# Altium PCB LCLFilter_CustomComp_Compact.PcbDoc
Units mm, origin at the board's own origin, x right, y up, seen from the top; angles counter-clockwise.
Board outline 127 x 101 mm, 2 copper layers (Top Layer, Bottom Layer); 17 components, 15 nets, 37 pads, 0 vias.
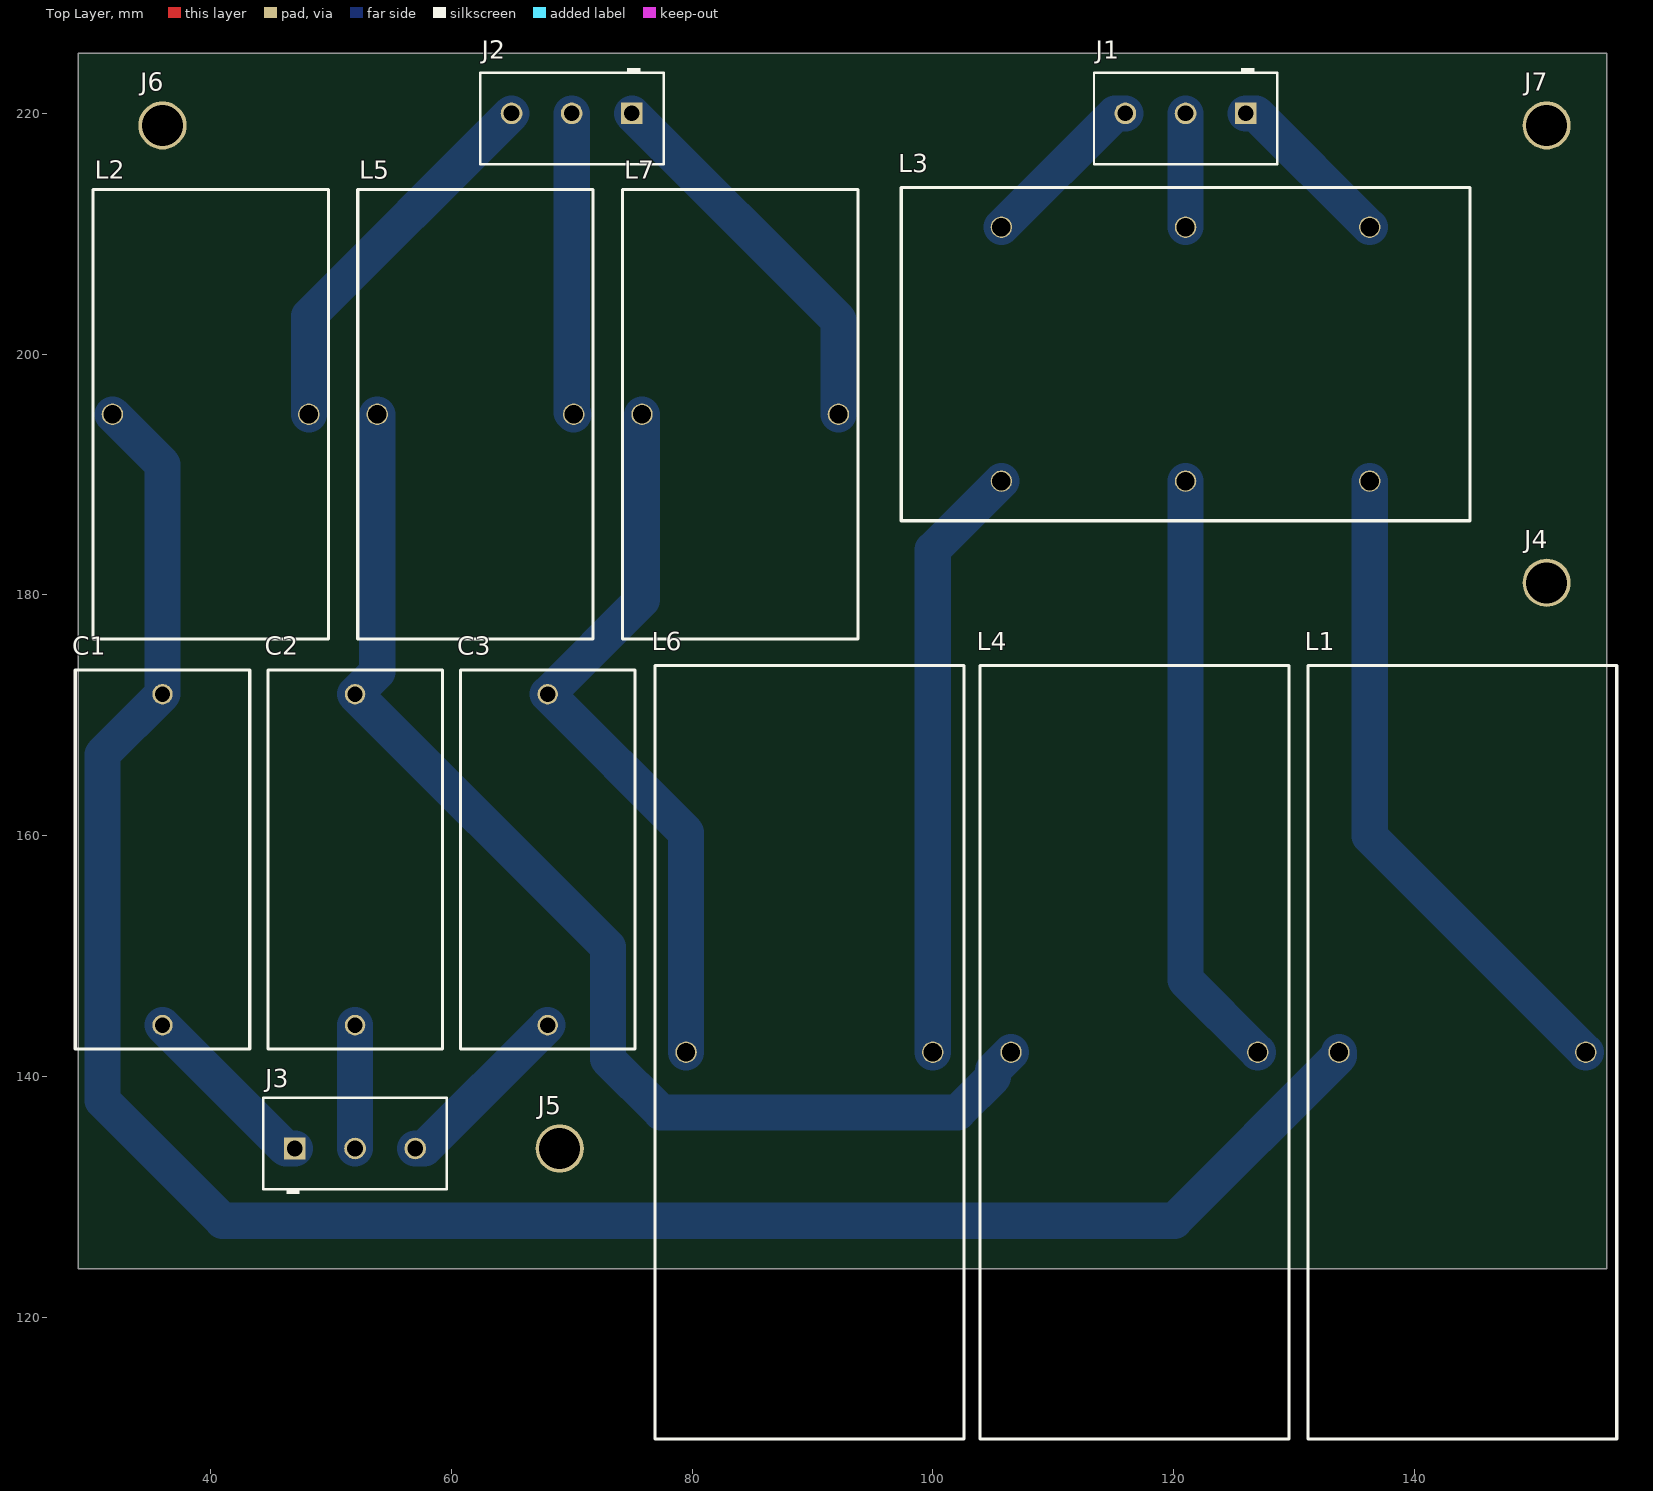
[diagram p0: Top Layer view]
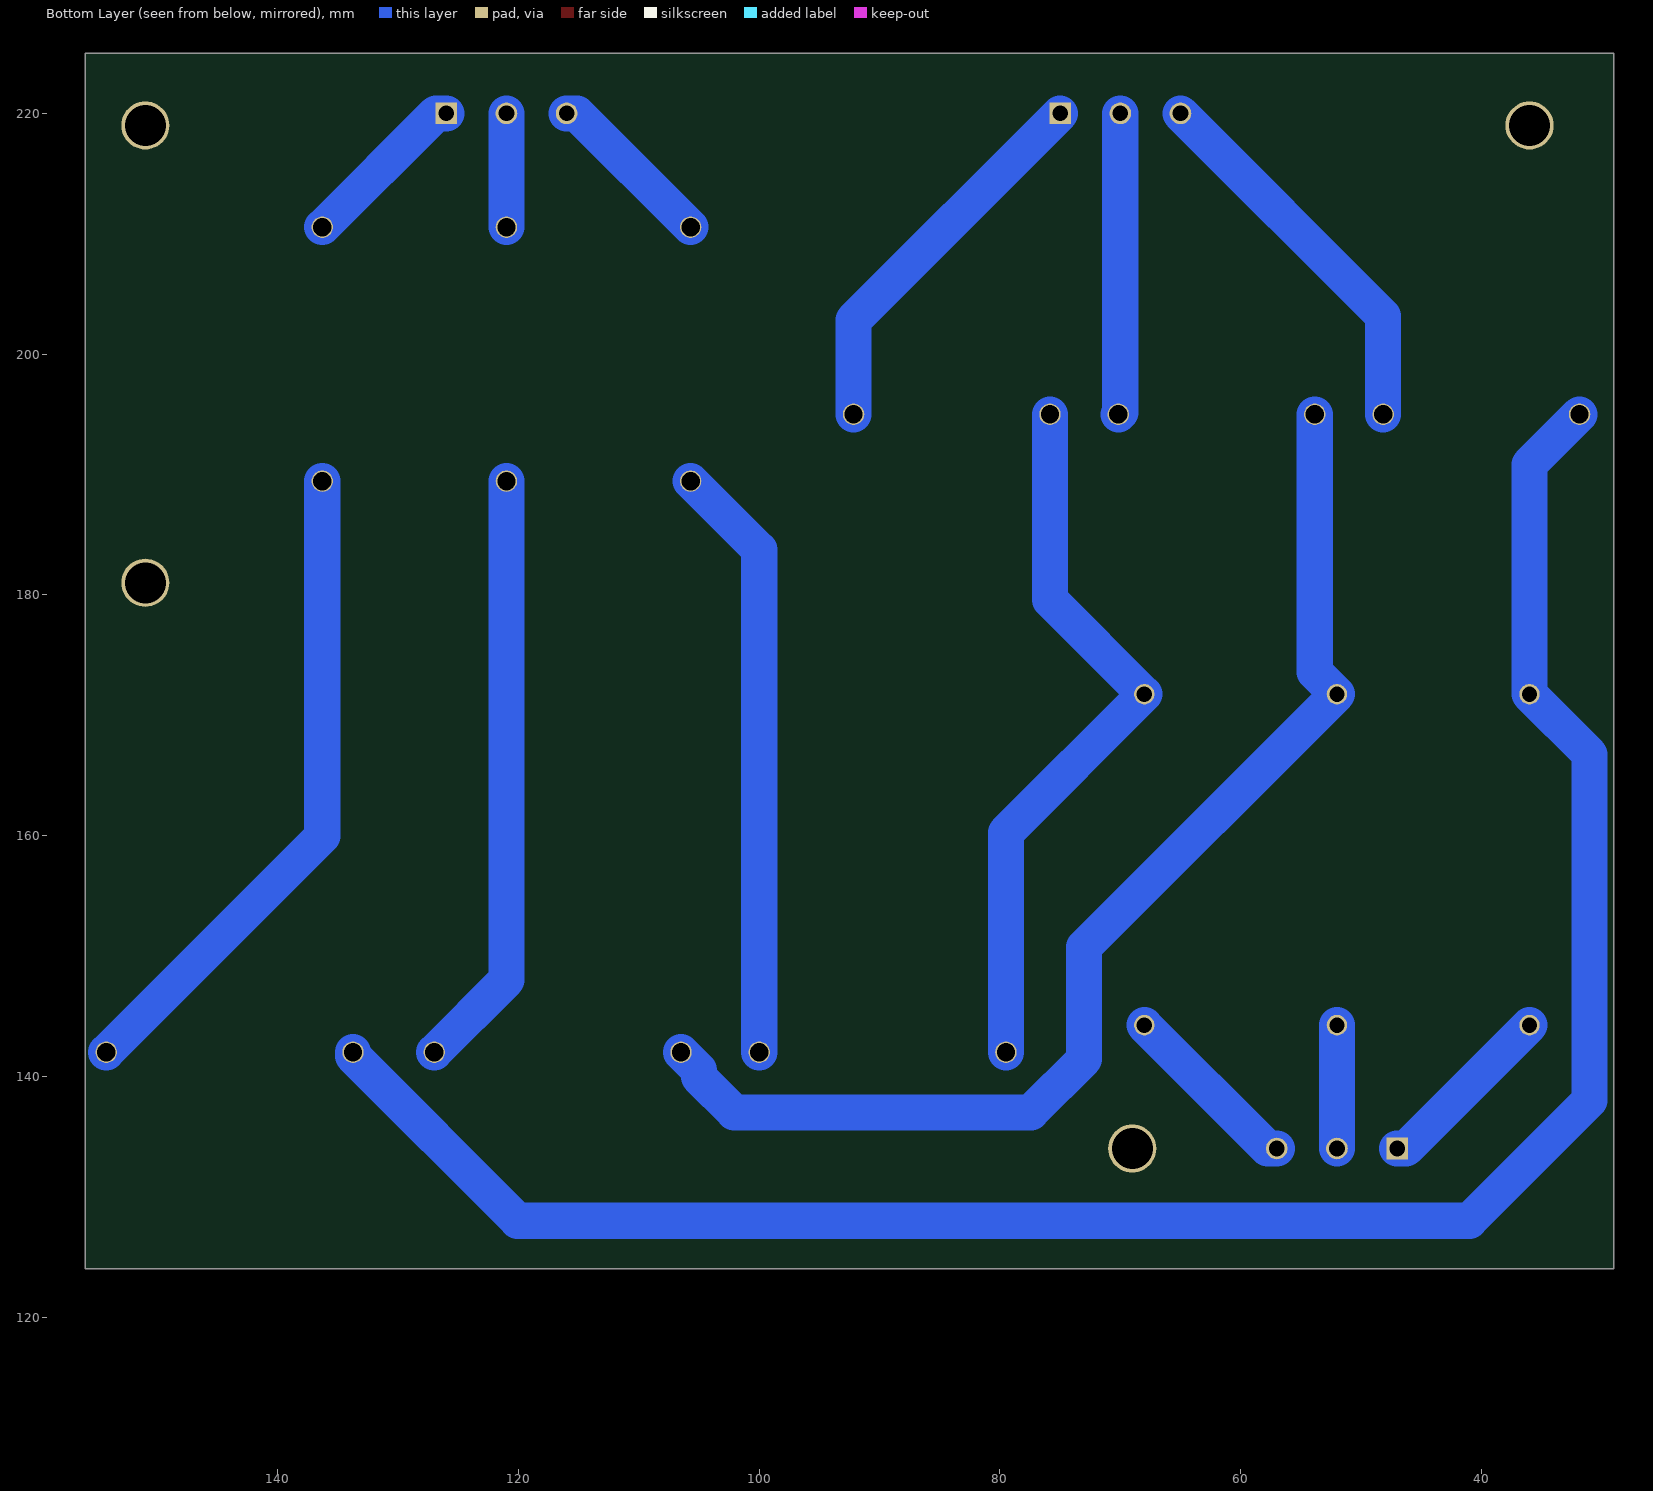
[diagram p1: Bottom Layer view, seen from below]
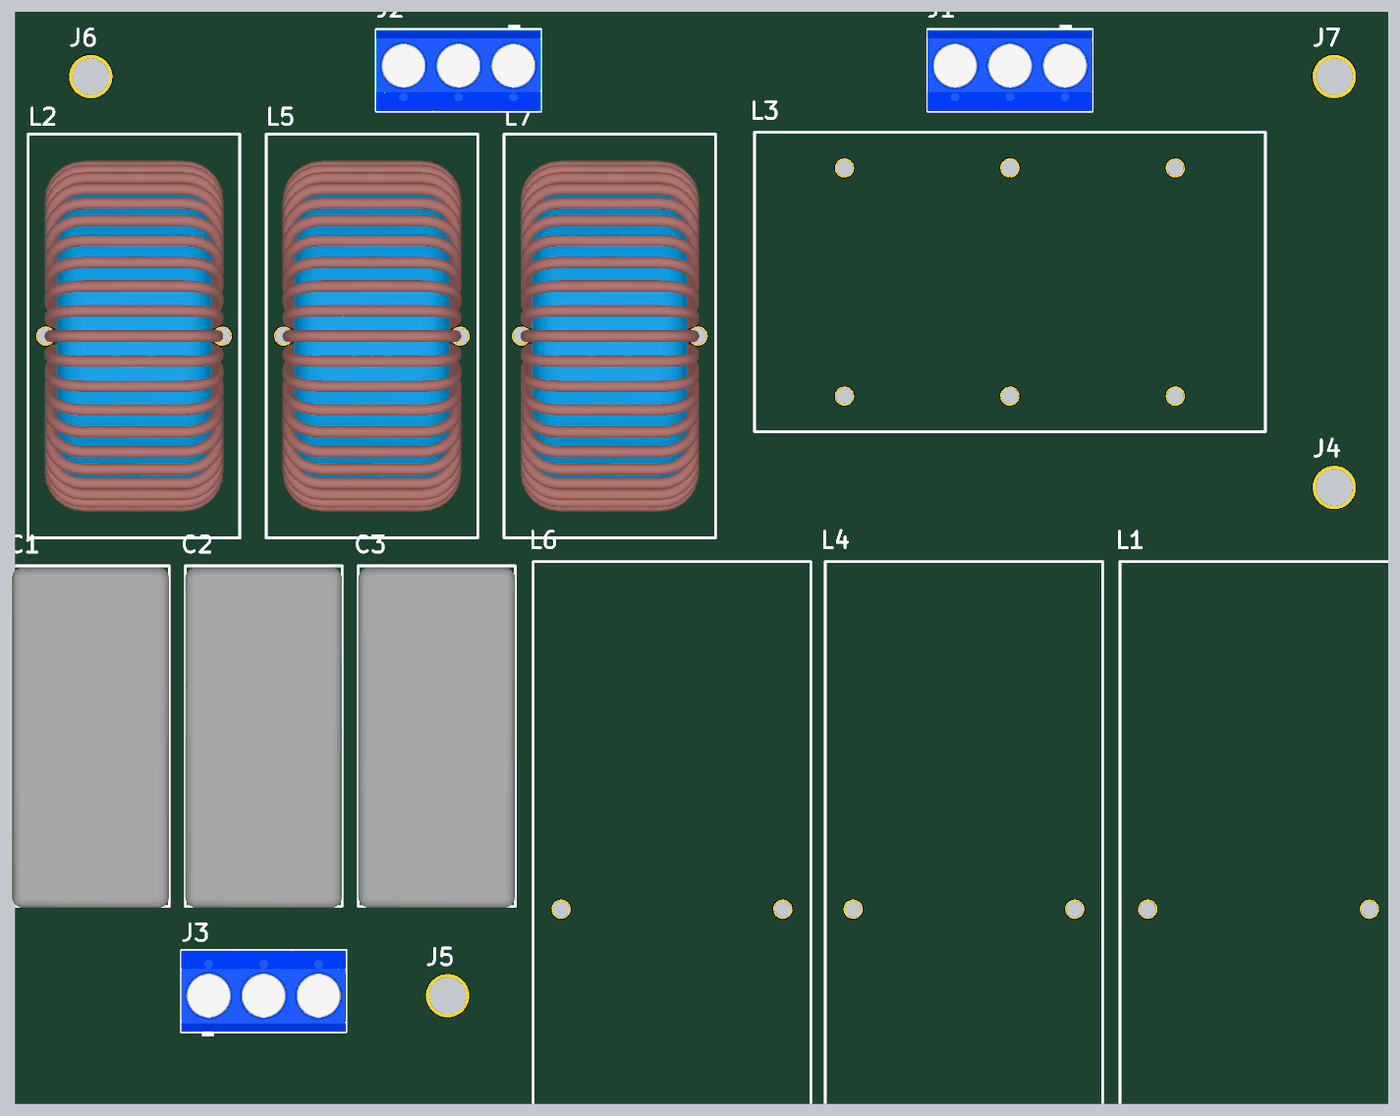
[diagram p2: 3D render of the assembled board from above, using the file's embedded part models]

## Layer stack, top to bottom
Top Solder: solder mask 0.0102, Solder Resist, Dk 3.5
Top Layer: signal copper 0.0356
Dielectric 1: dielectric 0.32, FR-4, Dk 4.8
Bottom Layer: signal copper 0.0356
Bottom Solder: solder mask 0.0102, Solder Resist, Dk 3.5

## Board outline
29,124 156,124 156,225 29,225

## Design rules (kind name [scope] priority, off if disabled: settings)
Clearance [All] p1: gap=0.254 ignorepadtopadclearanceinfootprint=FALSE except(0: Arc-Hole Track-Hole SMDPad-Hole THPad-Hole Via-Hole Fill-Hole Poly-Hole Region-Hole Text-Hole; 2: Arc-Arc Arc-Track Track-Track)
Height [All] p1: minheight=0 maxheight=50 prefheight=12.7
HoleSize [All] p1: absolutevalues=TRUE maxlimit=4 minlimit=0.025 maxpercent=80.000 minpercent=20.000
PolygonConnect [All] p1: connectstyle=Relief reliefconductorwidth=0.254 reliefentries=4 polygonreliefangle="90 Angle" airgapwidth=0.254
RoutingVias [All] p1: holewidth=0.711 width=1.27 viastyle="Through Hole" minholewidth=0.711 minwidth=1.27 maxholewidth=0.711 maxwidth=1.27
SolderMaskExpansion [All] p1: expansion=0.102 istentingtop=FALSE
Width [All] p1: maxlimit=5 minlimit=0.254 preferedwidth=0.254
28 further rules are at their usual default settings.

## Components (designator, comment, footprint, x,y, rotation, side; value= is the part's Value field where it differs from the comment)
C1 "PHE450HF7220JR06L2" "Film Capacitor PHE450HF7220JR06L2" 36,158 r180 top
C2 "PHE450HF7220JR06L2" "Film Capacitor PHE450HF7220JR06L2" 52,158 r180 top
C3 "PHE450HF7220JR06L2" "Film Capacitor PHE450HF7220JR06L2" 68,158 r180 top
J1 "3PinTerminal" "3 Pin Terminal" 121,220 r180 top
J2 "3PinTerminal" "3 Pin Terminal" 70,220 r180 top
J3 "3PinTerminal" "3 Pin Terminal" 52,134 r0 top
J4 "M3 Mounting Hole" "M3 Mounting Hole" 151,181 r0 top
J5 "M3 Mounting Hole" "M3 Mounting Hole" 69,134 r0 top
J6 "M3 Mounting Hole" "M3 Mounting Hole" 36,219 r0 top
J7 "M3 Mounting Hole" "M3 Mounting Hole" 151,219 r0 top
L1 "4mH" "4mH Custom" 144,142 r180 top
L2 "380uH" "380uH Custom" 40,195 r0 top
L3 "30mH CM" "CM Choke Custom" 121,200 r270 top
L4 "4mH" "4mH Custom" 116.75,142 r180 top
L5 "380uH" "380uH Custom" 62,195 r0 top
L6 "4mH" "4mH Custom" 89.75,142 r180 top
L7 "380uH" "380uH Custom" 84,195 r0 top

## Footprints (in the part's own frame and the unit in brackets; to place one, negate y for a bottom-side part, rotate by r counter-clockwise, add the part's x,y. Pads: shape width x height; smd on the part's side, far side on the other; paste and mask are expansions set on the pad)
"3 Pin Terminal" [mm] "WURTH ELEKTRONIK 691102710003"
  rect 1.8x1.8 hole 1.3: 1(-5,0)
  round 1.8 hole 1.3: 2(0,0) 3(5,0)
  silkscreen extent -7.63,-3.78 7.61,4.22, body extent -7.63,-3.3 7.61,4.2, height 10
"4mH Custom" [mil] "4mH Custom"
  round 70 hole 60: 1(-403.54,0) 2(403.54,0)
  silkscreen extent -505,-1265 505,1265
"380uH Custom" [mil] "380uH Custom"
  round 70 hole 60: 1(-321.26,0) 2(321.26,0)
  silkscreen extent -385,-735 385,735, body extent -325,-638 325,638, height 1342
"CM Choke Custom" [mil] "CM Choke Custom"
  round 70 hole 60: 1(-415.35,602.36) 2(-415.35,0) 3(-415.35,-602.36) 4(415.35,602.36) 5(415.35,0) 6(415.35,-602.36)
  silkscreen extent -545,-930 545,930
"Film Capacitor PHE450HF7220JR06L2" [mm] "KEMET PHE450 Metallised Polypropylene Film Capacitor, 180 V ac, 250 V dc, ±5%, 2.2µF, Through Hole"
  round 1.7 hole 1.27: 1(0,13.75) 2(0,-13.75)
  silkscreen extent -7.25,-15.75 7.25,15.75, body extent -7.24,-15.62 7.26,15.88, height 24.01
"M3 Mounting Hole" [mm]
  round 4 hole 3.4: 1(0,0)

## Part data
C1 C2 C3: "Capacitor", Manufacturer_Name=KEMET, Datasheet Link=https://docs.rs-online.com/a458/0900766b817170df.pdf, Height=24.5mm, Manufacturer_Part_Number=PHE450HF7220JR06L2
J1 J2 J3: "3 Position Terminal Block 5.08mm", Digikey Part Number=ED2610-ND, Manufacturer="On Shore Technology", Package=HDR03, Part Number=OSTTC032162, Temperature="-30°C to +105°C", Temperature Range High=+105°C, Temperature Range Low=-30°C, Voltage=300V, ComponentLink1Description=Upverter, ComponentLink1URL=https://upverter.com/upn/revision/2b80058b23306b34/, ComponentLink2Description=Datasheet, ComponentLink2URL=https://upverter.com/datasheet/d9a5d2e095ec14efdc364e45047c257fc4ca76eb.pdf, Digikey Description="CONN TERM BLOCK 5.08MM VERT 3POS PCB", helpURL=https://upverter.com/upn/revision/2b80058b23306b34/, Is Female=yes, Lead Free=yes, Price=0.382016875697, RoHS=TRUE, Supplier 1=Digi-Key, Supplier 2=Mouser, Supplier Part Number 1=ED2610-ND
L1 L4 L6: library part "4mH Custom Inductor"
L2 L5 L7: library part "380uH Custom Inductor"
L3: library part "30mH Custom CM Choke", "30mH Custom CM Choke", Manufacturer_Name="Wurth Elektronik", Manufacturer_Part_Number=744839029220, Mouser Part Number=710-744839029220, Datasheet Link=https://componentsearchengine.com//744839029220.pdf, Height=39mm, Mouser Price/Stock=https://www.mouser.co.uk/ProductDetail/Wurth-Elektronik/744839029220?qs=MoCBKJu1Jj15mDhjF%2F4U%252Bg%3D%3D

## Nets (pads, with @x,y where several pads share a name; then routed paths per layer and width w, separated by ;. In a path a pad name is that pad's centre, name@x,y a point inside that pad or via, vN(x,y) a via of type N, cw(c..) or ccw(c..) an arc to the next point about the centre after c; other vN are vias at no path point)
Damp1: C1.1 J3.1 | length 15.2
  Bottom Layer w3: C1.1 46.25,134 J3.1
Damp2: C2.1 J3.2 | length 10.2
  Bottom Layer w3: J3.2 C2.1
Damp3: C3.1 J3.3 | length 15.2
  Bottom Layer w3: J3.3 57.75,134 C3.1
NetC1_2: C1.2 L1.2 L2.1 | length 173.7
  Bottom Layer w3: L2.1 36,190.84 C1.2 31,166.75 31,138 41,128 120.071,128 133.75,141.679 L1.2
NetC2_2: C2.2 L4.2 L5.1 | length 100.8
  Bottom Layer w3: L5.1 53.84,173.59 C2.2 73,150.75 73,141.429 77.429,137 102.071,137 105,139.929 105,140.5 L4.2
NetC3_2: C3.2 L6.2 L7.1 | length 61
  Bottom Layer w3: L7.1 75.84,179.59 C3.2 79.5,160.25 L6.2
NetJ1_1: J1.1 L3.1 | length 14.2
  Bottom Layer w3: J1.1 126.85,220 L3.1
NetJ1_2: J1.2 L3.2 | length 9.5
  Bottom Layer w3: L3.2 J1.2
NetJ1_3: J1.3 L3.3 | length 14.2
  Bottom Layer w3: L3.3 115.15,220 J1.3
NetJ2_1: J2.1 L7.2 | length 32.1
  Bottom Layer w3: J2.1 92.16,202.84 L7.2
NetJ2_2: J2.2 L5.2 | length 25.1
  Bottom Layer w3: J2.2 70,195.16 L5.2
NetJ2_3: J2.3 L2.2 | length 32
  Bottom Layer w3: L2.2 48.16,203.16 J2.3
NetL1_1: L1.1 L3.4 | length 54.9
  Bottom Layer w3: L3.4 136.3,159.95 L1.1
NetL3_5: L3.5 L4.1 | length 49.9
  Bottom Layer w3: L3.5 121,148 L4.1
NetL3_6: L3.6 L6.1 | length 49.8
  Bottom Layer w3: L6.1 100,183.75 L3.6
pads on no net: J4.1 J5.1 J6.1 J7.1